# Altium PCB PCB Flyback.PcbDoc
Units mm, origin at the board's own origin, x right, y up, seen from the top; angles counter-clockwise.
Board outline 63 x 38.62 mm, 2 copper layers (Top Layer, Bottom Layer); 18 components, 12 nets, 82 pads, 0 vias.
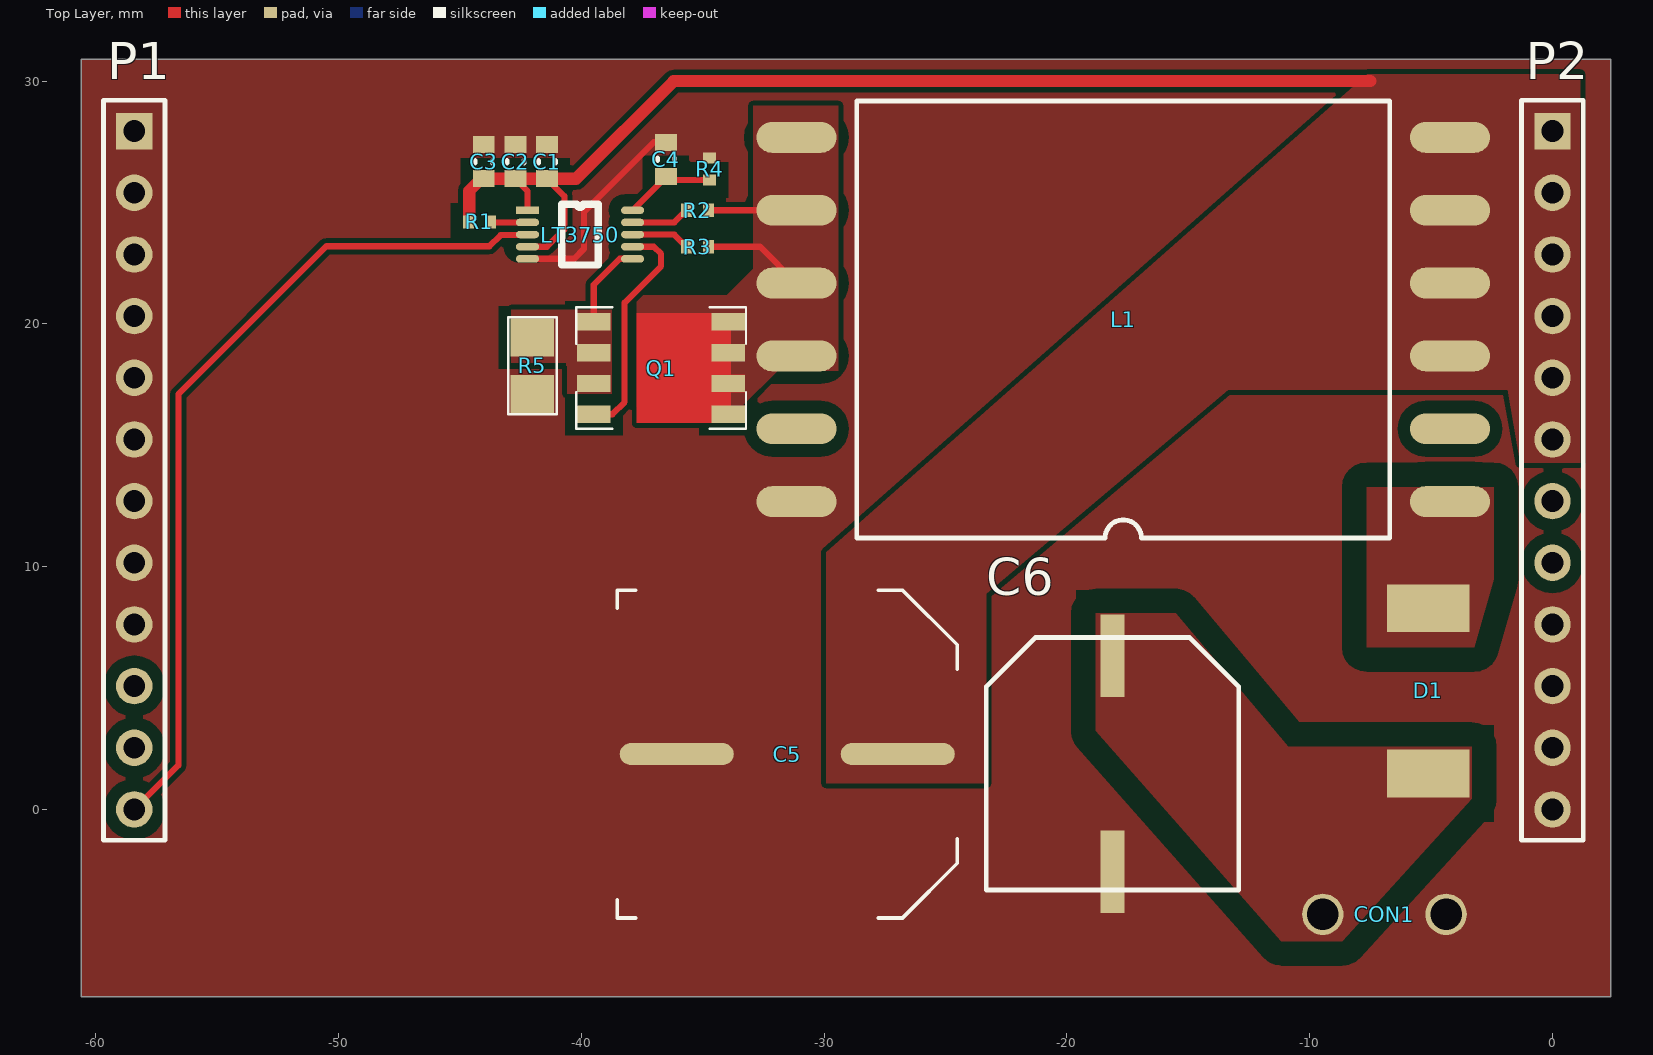
[diagram p0: Top Layer view]
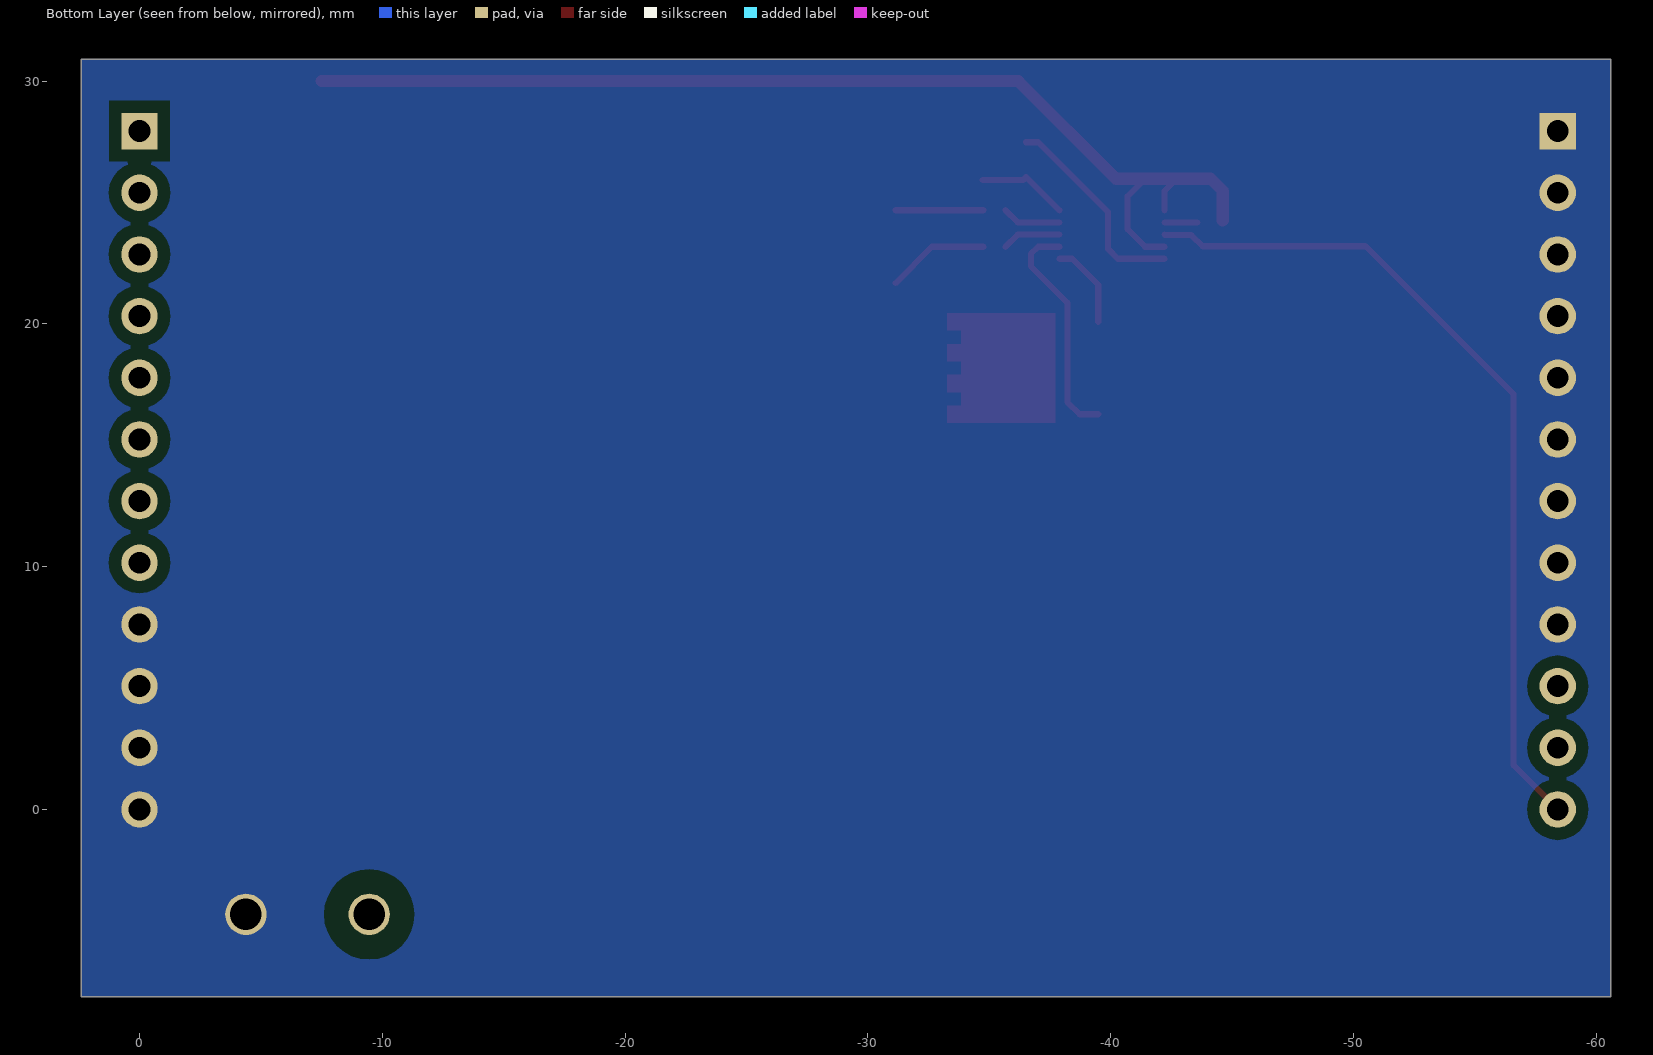
[diagram p1: Bottom Layer view, seen from below]

## Layer stack, top to bottom
Top Solder: solder mask 0.0102, Solder Resist, Dk 3.5
Top Layer: signal copper 0.0356
Dielectric 1: dielectric 0.32, FR-4, Dk 4.8
Bottom Layer: signal copper 0.0356
Bottom Solder: solder mask 0.0102, Solder Resist, Dk 3.5

## Board outline
-60.6,-7.72 -60.6,30.9 2.4,30.9 2.4,-7.72

## Design rules (kind name [scope] priority, off if disabled: settings)
Clearance Clearance_1 [InNetClass('HV')] p1: gap=1 ignorepadtopadclearanceinfootprint=TRUE
Clearance [All] p2: gap=0.2 ignorepadtopadclearanceinfootprint=TRUE except(0.5: SMDPad-Poly THPad-Poly)
PlaneClearance [All] p1: clearance=0.254
PlaneConnect [All] p1: planeconnectstyle=Direct reliefexpansion=0.508 reliefentries=4 reliefconductorwidth=0.254 reliefairgap=0.254
PolygonConnect "Power Connect" [All] p1 off: connectstyle=Direct reliefconductorwidth=0.254 reliefentries=4 polygonreliefangle="90 Angle" airgapwidth=0.254
PolygonConnect [All] p2: connectstyle=Direct reliefconductorwidth=0.254 reliefentries=4 polygonreliefangle="90 Angle" airgapwidth=0.254
RoutingVias [All] p1: holewidth=0.711 width=1.27 viastyle="Through Hole" minholewidth=0.711 minwidth=1.27 maxholewidth=0.711 maxwidth=1.27
SolderMaskExpansion [All] p1: expansion=0.05
Width [All] p1: maxlimit=2 minlimit=0.254 preferedwidth=0.254
28 further rules are at their usual default settings.

## Classes and differential pairs
net class HV: NetC6_Cap+ NetD1_D1-
polygon class "Vcc Trafo": NONET_L01_P000 NONET_L01_P001 NONET_L01_P005 NONET_L01_P011

## Components (designator, comment, footprint, x,y, rotation, side; value= is the part's Value field where it differs from the comment)
C1 "10uF" CAPC0603(1608)55_L -41.42,26.68 r90 top
C2 "10uF" CAPC0603(1608)55_L -42.72,26.68 r90 top
C3 "10uF" CAPC0603(1608)55_L -44.02,26.68 r90 top
C4 "100pF" CAPC0603(1608)55_L -36.52,26.78 r270 top
C5 "100uF" PCBComponent#1 -31.52,2.28 r90 top
C6 "22uF" "CAP ALUM 22UF 250V" -18.12,1.88 r90 top
CON1 "OSTTA024163" "TERM BLOCK 2P" -6.92,-4.32 r0 top
D1 "ES3J" DIODE -5.12,4.88 r90 top
L1 "DA2034 Transformer" "DA2034 TRANSFORMER" -4.22,12.68 r180 top
LT3750 "LT3750" LT3750 -42.22,24.68 r0 top
P1 "Header 12" HDR1X12 -58.42,27.94 r270 top
P2 "Header 12" HDR1X12 0,27.94 r270 top
Q1 "CSD18540Q5BT" PCBComponent#2 -36.72,18.18 r180 top
R1 "100K" 0402-RES-HD -44.2,24.2 r0 top value=100k
R2 "33K" 0402-RES-HD -35.22,24.68 r0 top
R3 "42K2" 0402-RES-HD -35.22,23.18 r180 top value=42.2K
R4 "2K2" 0402-RES-HD -34.72,26.38 r90 top value=2.2K
R5 "15m" RES1206 -42.02,18.28 r270 top

## Footprints (in the part's own frame and the unit in brackets; to place one, negate y for a bottom-side part, rotate by r counter-clockwise, add the part's x,y. Pads: shape width x height; smd on the part's side, far side on the other; paste and mask are expansions set on the pad)
0402-RES-HD [mm] "Chip Resistor, Body 1.0x0.5mm, IPC High Density"
  rect 0.45x0.55 smd: 1(-0.45,0) 2(0.45,0)
  body extent -0.52,-0.27 0.53,0.28, height 0.4
"CAP ALUM 22UF 250V" [mm] "22uF"
  rect 3.4x1 smd: Cap+(4.445,0) Cap-(-4.445,0)
  silkscreen extent -5.2,-5.2 5.2,5.2, body extent -8.64,-5.25 5.9,5.46, height 10.3
CAPC0603(1608)55_L [mm] "Chip Capacitor, Body 1.6x0.8mm, Height 0.55mm, IPC High Density"
  rect 0.7x0.9 smd: 1(-0.7,0) 2(0.7,0)
  silkscreen extent -0.05,-0.35 0.05,0.35, body extent -0.87,-0.47 0.88,0.48, height 0.55
"DA2034 TRANSFORMER" [mm]
  oval 3.3x1.27 smd: 1(0,0) 2(0,-3) 3(0,-6) 4(0,-9) 5(0,-12) 6(0,-15) 7(26.92,-15) 8(26.92,-12) 9(26.92,-9) 10(26.92,-6) 11(26.92,-3) 12(26.92,0)
  silkscreen extent 2.48,-16.5 24.44,1.5, body extent -0.82,-17.78 27.83,2.79, height 11.18
DIODE [mm]
  rect 1.96x3.39 smd: D1+(-3.4,0) D1-(3.4,0)
  body extent -3.9,-3.05 3.9,2.85, height 2.4
HDR1X12 [mm] "Connector; Header; 12 Position"
  rect 1.5x1.5 hole 0.9: 1(0,0)
  round 1.5 hole 0.9: 2(2.54,0) 3(5.08,0) 4(7.62,0) 5(10.16,0) 6(12.7,0) 7(15.24,0) 8(17.78,0) 9(20.32,0) 10(22.86,0) 11(25.4,0) 12(27.94,0)
  silkscreen extent -1.27,-1.27 29.21,1.27
LT3750 [mm]
  rect 0.95x0.305 smd: 1(0,0)
  oval 0.95x0.305 smd: 2(0,-0.5) 3(0,-1) 4(0,-1.5) 5(0,-2) 6(4.33,-2) 7(4.33,-1.5) 8(4.33,-1) 9(4.33,-0.5) 10(4.33,0)
  silkscreen extent 1.41,-2.25 2.92,0.25, body extent -0.25,-2.5 4.65,0.5, height 1.15
PCBComponent#1 [mm]
  oval 0.9x4.7 smd: 1(0,4.55) 2(0,-4.55)
  silkscreen extent -6.75,-7 6.75,7, body extent -6.73,-6.9 6.77,6.9, height 13.5
PCBComponent#2 [mm]
  rect 1.372x0.711 smd: 1(2.769,-1.905) 2(2.769,-0.635) 3(2.769,0.635) 4(2.769,1.905) 5(-2.769,1.905) 6(-2.769,0.635) 7(-2.769,-0.635) 8(-2.769,-1.905)
  Top Layer region: -3.454,2.261 0.991,2.261 0.991,-2.261 -3.454,-2.261 -3.454,-1.549 -2.87,-1.549 -2.87,-0.991 -3.454,-0.991 -3.454,-0.279 -2.87,-0.279 -2.87,0.279 -3.454,0.279 -3.454,0.991 -2.87,0.991 -2.87,1.549 -3.454,1.549
  silkscreen extent -3.5,-2.5 3.5,2.5, body extent -3.28,-2.53 2.72,2.47, height 1.1
RES1206 [mm]
  rect 1.57x1.78 smd: 1(-1.165,0) 2(1.165,0)
  silkscreen extent -2,-1 2,1, body extent -1.6,-0.83 1.6,0.83, height 0.53
"TERM BLOCK 2P" [mm]
  round 1.7 hole 1.3: 1(-2.54,0) 2(2.54,0)
  body extent -5.64,-3.1 4.96,4.5, height 10

## Part data
C1 C2 C3: library part C0603-10uF-16V-1, "CAP CER 10UF 16V X5R 0603", Part No=EMK107BBJ106MA-T, Cod EMS=05.281.019.592
C4: library part CC0603--1, "CAP CER 100PF 50V NP0 0603", Part No=GRM1885C1H101JA01D
C5: library part CA-100uF-3, "CAP ALUM 100UF 20% 80V SMD"
C6: library part "CAP ALUM 22UF 250V"
CON1: library part "Term Block 2P", "2 Position Wire to Board Terminal Block Horizontal with Board 0.200\" (5.08mm) Through Hole"
D1: library part Diode
P1 P2: "Header, 12-Pin", LatestRevisionDate=17-Jul-2002, LatestRevisionNote="Re-released for DXP Platform.", Publisher="Altium Limited"
Q1: library part CSD18540Q5BT-1, "MOSFET N-CH 60V 100A 8VSON", Part No=CSD18540Q5BT
R1: library part R0402-100K-11, "RES 100K OHM 1/10W 1% 0402 SMD 1", Part No=ERJ-2GEJ104X, Cod EMS=05.280.029.504, Family=ERJ-2GE....X, Family Description="RESISTOR FILME ESPESSO 0R-1M / 1/10W / 5% /  0402. P/N: ERJ-2GE....X – PANASONIC ELECTRONIC COMPONENTS."
R2: library part R0402-33K-7, "RES 33K OHM 1/10W 1% 0402 SMD", Part No=ERJ-2RKF3302X, Cod EMS=05.280.029.535, Family=ERJ-2RKF....X, Family Description="RESISTOR FILME ESPESSO 10R-1M / 1/10W / 1% / 0402. P/N: ERJ-2RKF....X – PANASONIC ELECTRONIC COMPONENTS."
R3: library part R0402-42K2-1, "RES 42.2K OHM 1/10W 1% 0402 SMD", Part No=ERJ-2RKF4222X
R4: library part R0402-2K2-5, "RES 2.2K OHM 1/10W 1% 0402 SMD", Part No=ERJ-2RKF2201X, Cod EMS=05.280.029.541, Family=ERJ-2RKF....X, Family Description="RESISTOR FILME ESPESSO 10R-1M / 1/10W / 1% / 0402. P/N: ERJ-2RKF....X – PANASONIC ELECTRONIC COMPONENTS."
R5: library part Res2, "Current Sense Resistors - SMD 1206 1Watt 0.015Ohms 1%", LatestRevisionDate=17-Jul-2002, LatestRevisionNote="Re-released for DXP Platform.", PackageDescription="Axial Device, Thru-Hole; 2 Leads; 0.4 in Pin Spacing", PackageReference=AXIAL-0.4, Published=8-Jun-2000, Publisher="Altium Limited"

## Free pads (board coordinates)
  round 0 on Mech16 paste+0 mask+0: 1(-30.42,24.28) 1(-28.92,24.78)

## Nets (pads, with @x,y where several pads share a name; then routed paths per layer and width w, separated by ;. In a path a pad name is that pad's centre, name@x,y a point inside that pad or via, vN(x,y) a via of type N, cw(c..) or ccw(c..) an arc to the next point about the centre after c; other vN are vias at no path point)
CHARGE_ENABLE: LT3750.3 P1.12 | length 35
  Top Layer w0.254: P1.12 -56.6,1.82 -56.6,17.1 -50.5,23.2 -43.788,23.2 -43.328,23.659 -42.241,23.659 LT3750.3
GND: C1.2 C2.2 C3.2 C4.1 C5.1 C6.Cap- CON1.2 L1.12 LT3750.5 P1.1 P1.2 P1.3 P1.4 P1.5 P1.6 P1.7 P1.8 P1.9 P2.9 P2.10 P2.11 P2.12 R4.2 R5.2 | length 8.6
  Top Layer w0.254: LT3750.5 -40.302,22.68 -39.897,23.085 -39.897,24.603 -37.02,27.48 C4.1
NetC4_2: C4.2 LT3750.10 R4.1 | length 3.8
  Top Layer w0.254: LT3750.10 -36.52,26.05 -36.4,25.93 R4.1
NetC6_Cap+: C6.Cap+ CON1.1 D1.D1+
NetD1_D1-: D1.D1- L1.1
NetL1_7: L1.7 L1.8 L1.9 L1.10 Q1.5 Q1.6 Q1.7 Q1.8 R2.2 R3.1 | length 7.9
  Top Layer w0.254: R3.1 -32.64,23.18 L1.9 ; R2.2 L1.8
NetLT3750_2: LT3750.2 R1.2 | length 1.4
  Top Layer w0.254: R1.2@-43.57,24.18 LT3750.2
NetLT3750_6: LT3750.6 Q1.1 Q1.2 Q1.3 R5.1 | length 3.6
  Top Layer w0.254: Q1.1 -39.489,21.611 -38.42,22.68 LT3750.6
NetLT3750_7: LT3750.7 Q1.4 | length 9.5
  Top Layer w0.254: Q1.4 -38.725,16.275 -38.22,16.78 -38.22,20.88 -36.72,22.38 -36.72,22.88 -37.02,23.18 LT3750.7
NetLT3750_8: LT3750.8 R3.2 | length 2.4
  Top Layer w0.254: LT3750.8 -36.17,23.68 R3.2
NetLT3750_9: LT3750.9 R2.1 | length 2.4
  Top Layer w0.254: LT3750.9 -36.17,24.18 R2.1
VCC: C1.1 C2.1 C3.1 C5.2 L1.3 L1.4 L1.5 L1.6 LT3750.1 LT3750.4 P2.1 P2.2 P2.3 P2.4 P2.5 P2.6 R1.1 | length 46
  Top Layer w0.254: R1.1@-44.62,24.27 R1.1@-44.55,24.2 ; C2.1 -42.22,25.48 LT3750.1 ; LT3750.4 -41.42,23.18 -40.7,23.9 -40.7,25.26 C1.1
  Top Layer w0.5: R1.1@-44.62,24.27 -44.62,25.48 -44.12,25.98 C3.1 C2.1 C1.1 -40.22,25.98 -36.2,30 -7.5,30
pads on no net: L1.2 L1.11 P1.10 P1.11 P2.7 P2.8

## Polygon pours and split planes (outlines as drawn)
NetD1_D1- on Top Layer "Diode Power" (solid, remove dead copper, pour order 65): -3.22,6.68 -2.42,9.48 -2.42,13.28 -4.32,13.28 -7.655,13.28 -7.655,7.72 -7.655,6.68
NetC6_Cap+ on Top Layer "Cap+ Power" (solid, remove dead copper, pour order 71): -10.893,2.58 -3.32,2.58 -3.32,0.432 -8.655,-5.42 -11.166,-5.42 -18.82,3.236 -18.82,8.08 -15.526,8.08
VCC on Top Layer "VCC Power" (solid, remove dead copper, pour order 61): -7.62,30.28 -29.92,10.588 -29.92,1.08 -23.32,1.08 -23.32,8.88 -13.361,17.28 -1.851,17.28 -1.32,14.28 1.142,14.28 1.142,30.28
NetL1_7 on Top Layer "Trafo-Mosfet Power" (solid, remove dead copper, pour order 55): -29.42,28.98 -29.42,18.08 -31.92,18.08 -33.42,16.58 -37.72,16.58 -37.72,21.18 -34.02,21.18 -32.92,22.28 -32.92,28.98
NetLT3750_6 on Top Layer "Rsense Power" (solid, remove dead copper, pour order 59): -38.757,20.58 -38.757,17.08 -40.583,17.08 -40.583,18.28 -42.883,18.28 -42.883,20.58
GND on Top Layer "GND Top" (solid, remove dead copper, pour order 102): 2.4,-7.72 2.4,30.9 -60.6,30.9 -60.6,-7.72
GND on Bottom Layer "GND Bottom" (solid, remove dead copper, pour order 81): 2.4,-7.72 -60.6,-7.72 -60.6,30.9 2.4,30.9

## Silkscreen, mask and mechanical layers (free items; w line width, h text height)
Mechanical 1:
  the board outline again, w0.2